# Altium PCB 4_iip_closure.PcbDoc
Units mm, origin at the board's own origin, x right, y up, seen from the top; angles counter-clockwise.
Board outline 67.5 x 28 mm, 2 copper layers (Top Layer, Bottom Layer), stack 1.571 mm thick; 4 components, 1 nets, 4 pads, 0 vias.
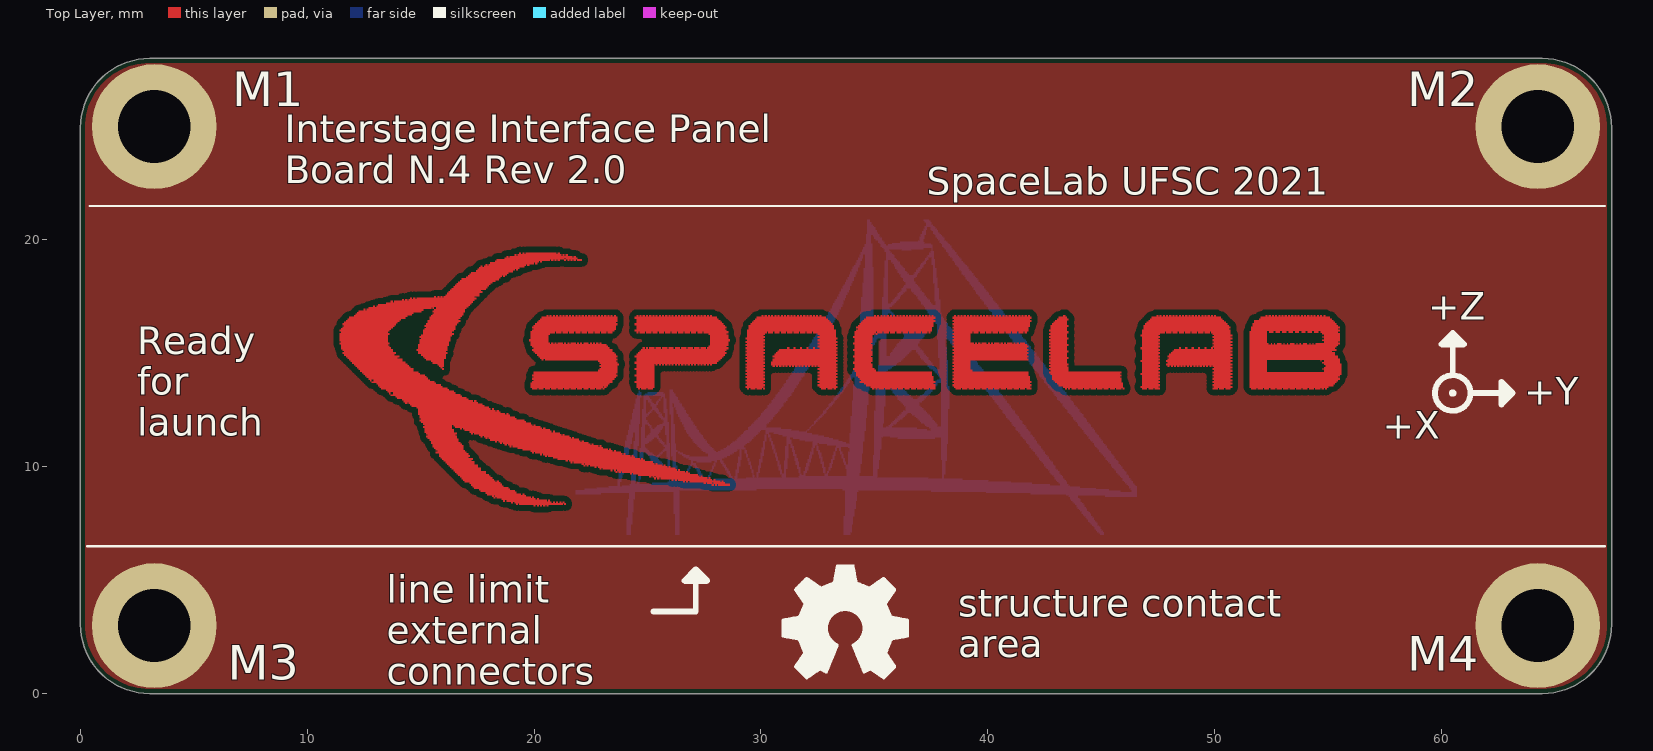
[diagram p0: Top Layer view]
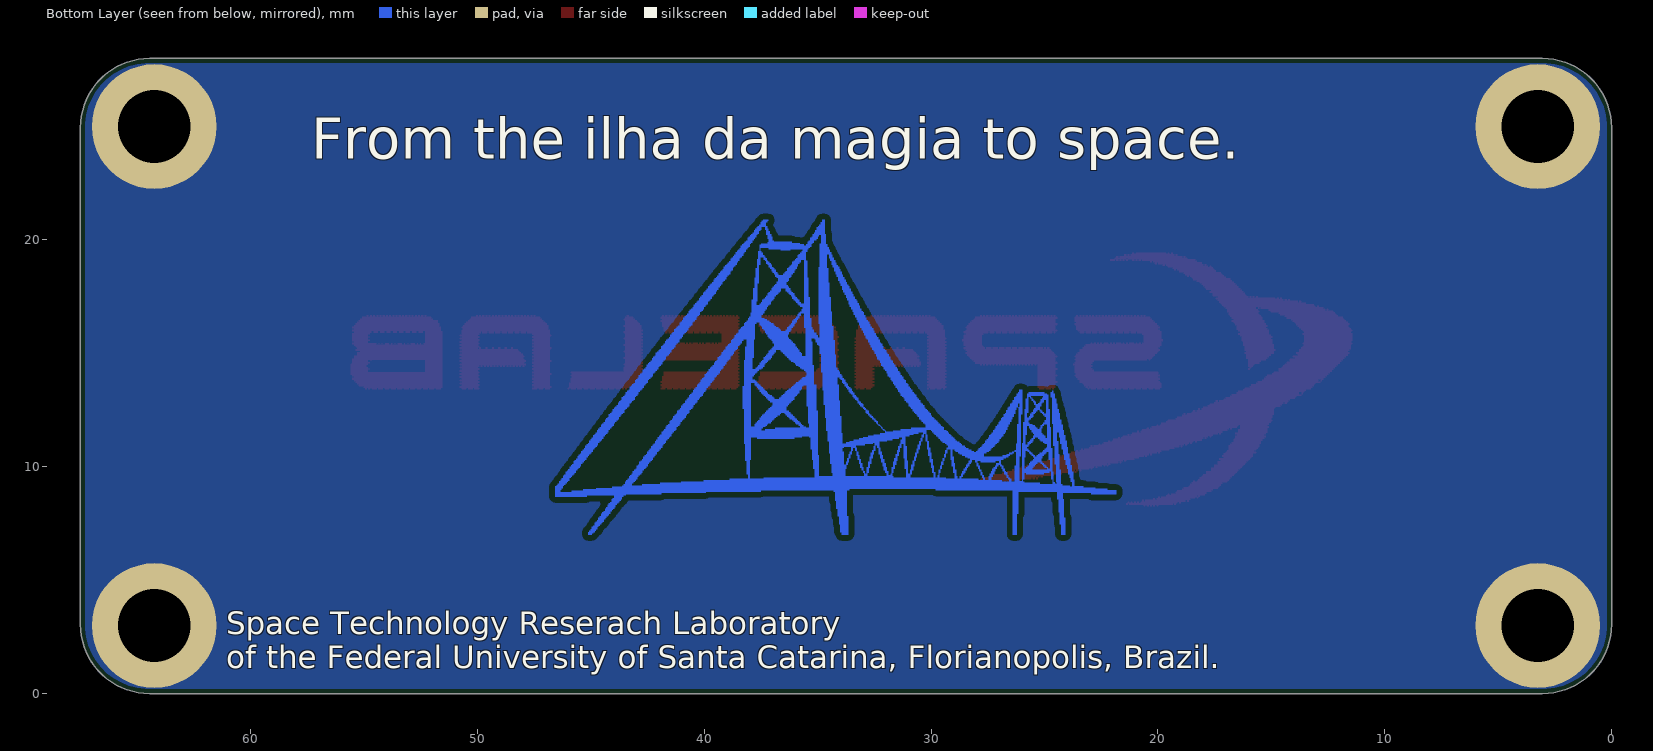
[diagram p1: Bottom Layer view, seen from below]

## Layer stack, top to bottom
Top Solder: solder mask 0.0102, Solder Resist, Dk 3.5
Top Layer: signal copper 0.0356
Dielectric 1: dielectric 1.5, FR-4, Dk 4.8
Bottom Layer: signal copper 0.0356
Bottom Solder: solder mask 0.0102, Solder Resist, Dk 3.5

## Board outline
0,3.048 ccw(c3.048,3.048) 3.048,0 64.452,0 ccw(c64.452,3.048) 67.5,3.048 67.5,24.952 ccw(c64.452,24.952) 64.452,28 3.048,28 ccw(c3.048,24.952) 0,24.952

## Design rules (kind name [scope] priority, off if disabled: settings)
BoardOutlineClearance BoardOutlineClearance_JLCPCB [All] p1: gap=0.2 ignorepadtopadclearanceinfootprint=FALSE
BoardOutlineClearance [All] p2: gap=0.254 ignorepadtopadclearanceinfootprint=FALSE except(0: Arc-SplitContinuation Track-SplitContinuation SMDPad-SplitContinuation THPad-SplitContinuation Via-SplitContinuation Fill-SplitContinuation Poly-SplitContinuation Region-SplitContinuation Text-SplitContinuation)
Clearance Clearance_JLCPCB_capabilities [All] p1: gap=0.254 ignorepadtopadclearanceinfootprint=FALSE except(0: SMDPad-Hole THPad-Hole Via-Hole Fill-Hole Poly-Hole Region-Hole Text-Hole; 0.127: Arc-Arc Arc-Track Track-Track SMDPad-SMDPad; 0.15: SMDPad-Text THPad-Text; 0.152: SMDPad-THPad; 0.2: Arc-SMDPad Track-SMDPad; 0.33: Arc-THPad Track-THPad; 0.54: THPad-THPad) // Minimal clearances considering JLCPCB manufacturing
Clearance [All] p2: gap=0.254 ignorepadtopadclearanceinfootprint=FALSE except(0: Arc-Hole Track-Hole SMDPad-Hole THPad-Hole Via-Hole Fill-Hole Poly-Hole Region-Hole Text-Hole) // Default altium designer clearence rule
HoleSize HoleSize_JLCPCB_capabilities [All] p1: absolutevalues=TRUE maxlimit=6.3 minlimit=0.3 maxpercent=80.000 minpercent=20.000
HoleSize [All] p2: absolutevalues=TRUE maxlimit=2.54 minlimit=0.025 maxpercent=80.000 minpercent=20.000
HoleToHoleClearance HoleToHoleClearance_JLCPCB [All] p1: gap=0.54 allowstackedmicrovias=TRUE
HoleToHoleClearance [All] p2: gap=0.254 allowstackedmicrovias=TRUE
MinimumAnnularRing AnnularRing_JLCPCB_1oz_capabilities [All] p1: minimumring=0.13
MinimumAnnularRing [All] p2: minimumring=0.254
MinimumSolderMaskSliver MinimumSolderMaskSliver_JLCPCB [All] p1: minsoldermaskwidth=0.2
MinimumSolderMaskSliver [All] p2: minsoldermaskwidth=0.254
PolygonConnect PolygonConnect_GND [InNet('GND')] p1: connectstyle=Direct reliefconductorwidth=0.254 reliefentries=4 polygonreliefangle="90 Angle" airgapwidth=0.254
PolygonConnect PolygonConnect_Power [(InNet('JTAG3_VCC') OR InNet('JTAG4_VCC'))] p2: connectstyle=Direct reliefconductorwidth=0.254 reliefentries=4 polygonreliefangle="90 Angle" airgapwidth=0.254 // Power polygons for power nets (debugger and battery charger)
PolygonConnect [All] p3: connectstyle=Relief reliefconductorwidth=0.254 reliefentries=4 polygonreliefangle="90 Angle" airgapwidth=0.254
RoutingVias RoutingVias_JLCPCB_capabilities [All] p1: holewidth=0.3 width=0.6 viastyle="Through Hole" minholewidth=0.3 minwidth=0.6 maxholewidth=0.711 maxwidth=1.27
RoutingVias [All] p2: holewidth=0.711 width=1.27 viastyle="Through Hole" minholewidth=0.711 minwidth=1.27 maxholewidth=0.711 maxwidth=1.27
SilkToSolderMaskClearance SilkToSolderMaskClearance_JLCPCB [IsPad] p1: minsilkscreentomaskgap=0.15 clearancetoexposedcopper=TRUE
SilkToSolderMaskClearance [IsPad] p2: minsilkscreentomaskgap=0.254 clearancetoexposedcopper=TRUE
SolderMaskExpansion SolderMaskExpansion_JLCPCB [All] p1: expansion=0.05
SolderMaskExpansion [All] p2: expansion=0.102
Width Width_JLCPCB_capabilities [All] p1: maxlimit=0.508 minlimit=0.127 preferedwidth=0.254 minimp=50.000000 maximp=50.000000 favimp=50.000000 // Width considering JLCPCB manufacturing
Width [All] p2: maxlimit=0.254 minlimit=0.254 preferedwidth=0.254
26 further rules are at their usual default settings.

## Components (designator, comment, footprint, x,y, rotation, side; value= is the part's Value field where it differs from the comment)
M1 "IB Mechanical Hole" "M3 hole (5.5mm pad)"#1 3.25,25 r0 top
M2 "IB Mechanical Hole" "M3 hole (5.5mm pad)"#1 64.25,25 r0 top
M3 "IB Mechanical Hole" "M3 hole (5.5mm pad)"#2 3.25,2 r0 top
M4 "IB Mechanical Hole" "M3 hole (5.5mm pad)"#2 64.25,2 r0 top

## Footprints (in the part's own frame and the unit in brackets; to place one, negate y for a bottom-side part, rotate by r counter-clockwise, add the part's x,y. Pads: shape width x height; smd on the part's side, far side on the other; paste and mask are expansions set on the pad)
"M3 hole (5.5mm pad)"#1 [mm]
  round 5.5 hole 3.2: 0(0,0)
"M3 hole (5.5mm pad)"#2 [mm]
  round 5.5 hole 3.2: 0(0,1)

## Part data
M1 M2 M3 M4: "Mechanical Hole for FloripaSat-2 interface boards"

## Nets (pads, with @x,y where several pads share a name; then routed paths per layer and width w, separated by ;. In a path a pad name is that pad's centre, name@x,y a point inside that pad or via, vN(x,y) a via of type N, cw(c..) or ccw(c..) an arc to the next point about the centre after c; other vN are vias at no path point)
GND: M1.0 M2.0 M3.0 M4.0

## Polygon pours and split planes (outlines as drawn)
GND on Top Layer "Top Layer-GND" (solid, remove dead copper, pour order 12): 0,24.952 cw(c3.048,24.952) 3.048,28 64.452,28 cw(c64.452,24.952) 67.5,24.952 67.5,3.048 cw(c64.452,3.048) 64.452,0 3.048,0 cw(c3.048,3.048) 0,3.048
GND on Bottom Layer "Top Layer-GND" (solid, remove dead copper, pour order 20): 0,24.952 cw(c3.048,24.952) 3.048,28 64.452,28 cw(c64.452,24.952) 67.5,24.952 67.5,3.048 cw(c64.452,3.048) 64.452,0 3.048,0 cw(c3.048,3.048) 0,3.048

## Other copper
Top Layer:
  region: 21.332,8.394 21.402,8.394 21.402,8.324 21.332,8.324 21.332,8.394 21.261,8.394 21.261,8.465 21.332,8.465
  region: 201 vertices and 0 holes, not listed, extent 42.702,13.419 46.028,16.674
  region: 301 vertices and 0 holes, not listed, extent 34.069,13.419 37.678,16.674
  region: 407 vertices and 0 holes, not listed, extent 24.445,13.419 28.62,16.674
  region: 495 vertices and 0 holes, not listed, extent 46.736,13.419 50.769,16.674
  region: 511 vertices and 0 holes, not listed, extent 29.328,13.419 33.361,16.674
  region: 387 vertices and 0 holes, not listed, extent 38.456,13.419 41.924,16.674
  region: 386 vertices and 0 holes, not listed, extent 19.775,13.419 23.738,16.674
  region: 253 vertices and 3 holes, not listed, extent 51.547,13.419 55.581,16.674
  region: 1334 vertices and 3 holes, not listed, extent 11.425,8.253 28.62,19.433
  text "'.Layer_Name'" at 177.571,-11.538 h2.5
Bottom Layer:
  region: 1551 vertices and 46 holes, not listed, extent 21.838,7.005 46.565,20.896
  text "'.Layer_Name'" at 177.571,-11.538 h2.5

## Silkscreen, mask and mechanical layers (free items; w line width, h text height)
Top Overlay:
  drawing of 988 lines, arcs and shapes, not listed
  text "Interstage Interface Panel  / Board N.4 Rev 2.0" at 9,22.5 h1.2
  text "SpaceLab UFSC 2021" at 37.3,22 h1.2
  text "+Z" at 59.41,16.475 h1.2
  text "+Y" at 63.66,12.725 h1.2
  text "Ready / for / launch" at 2.5,11.367 h1.2
  text "+X" at 57.41,11.225 h1.2
  text "structure contact / area" at 38.7,1.596 h1.2
  text "line limit  / external / connectors" at 13.5,0.4 h1.2
  text "'.Layer_Name'" at 177.571,-11.538 h2.5
Bottom Overlay:
  text "From the ilha da magia to space." at 57.325,23.575 h1.8
  text "Space Technology Reserach Laboratory / of the Federal University of Santa Catarina, Florianopolis, Brazil." at 61.075,1.125 h1
  text "'.Layer_Name'" at 177.571,-11.538 h2.5
Top Paste:
  text "'.Layer_Name'" at 177.571,-11.538 h2.5
Bottom Paste:
  text "'.Layer_Name'" at 177.571,-11.538 h2.5
Top Solder:
  drawing of 10 lines, arcs and shapes, not listed
  text "'.Layer_Name'" at 177.571,-11.538 h2.5
Bottom Solder:
  region: 1551 vertices and 46 holes, not listed, extent 21.838,7.005 46.565,20.896
  text "'.Layer_Name'" at 177.571,-11.538 h2.5
Drill Guide:
  text "'.Layer_Name'" at 177.571,-11.538 h2.5
Board Edge:
  lines w0.2: 0,3.065 ccw(c3.065,3.065) 3.065,0 64.435,0 ccw(c64.435,3.065) 67.5,3.065 67.5,24.959 ccw(c64.459,24.959) 64.459,28 3.139,28 ccw(c3.139,24.861) 0,24.861 0,13.8 0,3.065
  text "'.Layer_Name'" at 193.75,-11.425 h2.5
Dimensions:
  circle w0.2: c64.25,25 r1.6
  circle w0.2: c64.25,2.975 r1.6
  circle w0.2: c3.25,3 r1.6
  circle w0.2: c3.25,25 r1.6
  region: 34.45,5.337 34.95,5.837 35.45,5.337
  lines w0.2: 0.3,6.5 67.15,6.5 ; 0.3,21.5 67.15,21.5
  lines w0.254: 33.085,4.097 34.95,4.097 34.95,5.962 ; 33.75,0.025 33.75,28 ; 34.45,5.462 34.95,5.962 ; 35.45,5.462 34.95,5.962
  text "Mechanical specs:" at 13.25,30.525 h1.5
  text "structure contact area" at 20.275,23.5 h1.2
  text "external connectors area" at 18.775,13.275 h1.2
  text "structure contact area" at 35.875,4.35 h1.2
  text "(cm)" at 18.325,3.975 h1
  text "line limit  / external connectors" at 16.15,1.525 h1.2
  text "'.Layer_Name'" at 177.571,-11.538 h2.5
BOTTOM ASM:
  text "'.Layer_Name'" at 177.601,-11.533 h2.5
TOP ASM:
  text "'.Layer_Name'" at 177.571,-11.538 h2.5
Sheet:
  drawing of 228 lines, arcs and shapes, not listed
  text "1" at 8.746,161.611 h1.78
  text "2" at 81.39,161.611 h1.78
  text "3" at 154.542,161.611 h1.78
  text "4" at 227.44,161.611 h1.78
  text "A" at -25.595,138.599 h1.78
  text "A" at 261.425,138.599 h1.78
  text "B" at -25.595,90.542 h1.78
  text "B" at 261.425,90.542 h1.78
  text "Layer" at 2.899,70.325 h1.2
  text "Name" at 11.097,70.325 h1.2
  text "Material" at 29.692,70.325 h1.2
  text "Thickness" at 46.887,70.325 h1.2
  text "Constant" at 59.884,70.325 h1.2
  text "Board Layer Stack" at 71.281,70.325 h1.2
  text "1" at 2.899,67.925 h1.2
  text "Top Overlay" at 11.097,67.925 h1.2
  text "2" at 2.899,65.525 h1.2
  text "Top Solder" at 11.097,65.525 h1.2
  text "Solder Resist" at 29.692,65.525 h1.2
  text "0.010mm" at 46.887,65.525 h1.2
  text "3.5" at 59.884,65.525 h1.2
  text "3" at 2.899,63.125 h1.2
  text "Top Layer" at 11.097,63.125 h1.2
  text "Copper" at 29.692,63.125 h1.2
  text "0.036mm" at 46.887,63.125 h1.2
  text "4" at 2.899,60.725 h1.2
  text "Dielectric 1" at 11.097,60.725 h1.2
  text "FR-4" at 29.692,60.725 h1.2
  text "1.500mm" at 46.887,60.725 h1.2
  text "4.8" at 59.884,60.725 h1.2
  text "5" at 2.899,58.325 h1.2
  text "Bottom Layer" at 11.097,58.325 h1.2
  text "Copper" at 29.692,58.325 h1.2
  text "0.036mm" at 46.887,58.325 h1.2
  text "6" at 2.899,55.925 h1.2
  text "Bottom Solder" at 11.097,55.925 h1.2
  text "Solder Resist" at 29.692,55.925 h1.2
  text "0.010mm" at 46.887,55.925 h1.2
  text "3.5" at 59.884,55.925 h1.2
  text "Fabrication specifications:" at 139.357,54.778 h3.1
  text "7" at 2.899,53.525 h1.2
  text "Bottom Overlay" at 11.097,53.525 h1.2
  text "C" at -25.595,42.028 h1.78
  text "C" at 261.425,42.028 h1.78
  text "- Copper base: 1oz  / - PCB Material: Prepeg FR4-Standard / - PCB Tickness: 1.6mm / - PCB Surface: HASL (with lead)" at 139.351,37.794 h1.73
  text "- Silkscreen Color: White (top and bottom) / - Soldermask Color: Green / - Vias: Force Complete Tenting / - Stack-up: Standard 2 layer 1.6mm thickness / - Special requirements: None" at 197.051,37.794 h1.73
  text "SpaceLab - Federal University of Santa Catarina" at 170.5,-2 h2.5
  text "D" at -25.595,-5.978 h1.78
  text "D" at 261.425,-5.978 h1.78
  text "Project:" at 170.5,-6.5 h2.5
  text "Interstage Interface Panel Nº4" at 178.5,-6.5 h2.5
  text "Layer:" at 170.5,-11.5 h2.5
  text "Designed by:" at 170.5,-16.5 h2.5
  text "Project Code:" at 228.5,-16.5 h2.5
  text "IIP4" at 243,-16.5 h2.5
  text "Yan C. de Azeredo" at 184.426,-16.533 h2.5
  text "v2.0" at 208.526,-21.433 h2.5
  text "Date:" at 170.5,-21.5 h2.5
  text "'.Print_Date'" at 176.5,-21.5 h2.5
  text "Version:" at 199.5,-21.5 h2.5
  text "Size:" at 228.5,-21.5 h2.5
  text "A4" at 234.5,-21.5 h2.5
  text "1" at 8.746,-26.349 h1.78
  text "2" at 81.39,-26.349 h1.78
  text "3" at 154.542,-26.349 h1.78
  text "4" at 227.44,-26.349 h1.78
Drill Drawing:
  lines w0.2: -14.981,43.65 -13.647,43.65 -13.647,44.983 -14.981,44.983 -14.981,43.65
  lines w0.3: -16.176,42.75 122.826,42.75 ; -16.176,45.75 122.826,45.75 ; -5.159,39.75 -5.159,48.75 ; 4.439,39.75 4.439,48.75 ; 27.432,39.75 27.432,48.75 ; 37.549,39.75 37.549,48.75 ; 52.226,39.75 52.226,48.75 ; 82.217,39.75 82.217,48.75 ; 94.013,39.75 94.013,48.75 ; 108.929,39.75 108.929,48.75 ; -16.176,39.75 122.826,39.75 122.826,48.75 -16.176,48.75 -16.176,39.75
  text "Symbol" at -14.376,46.65 h1.44
  text "Count" at -4.259,46.65 h1.44
  text "Hole Size" at 5.339,46.65 h1.44
  text "Plated" at 28.332,46.65 h1.44
  text "Hole Type" at 38.449,46.65 h1.44
  text "Drill Layer Pair" at 53.126,46.65 h1.44
  text "Via/Pad" at 83.117,46.65 h1.44
  text "Pad Shape" at 94.913,46.65 h1.44
  text "Template" at 109.829,46.65 h1.44
  text "4" at -4.259,43.65 h1.2
  text "3.200mm (125.98mil)" at 5.339,43.65 h1.2
  text "PTH" at 28.332,43.65 h1.2
  text "Round" at 38.449,43.65 h1.2
  text "Top Layer - Bottom Layer" at 53.126,43.65 h1.2
  text "Pad" at 83.117,43.65 h1.2
  text "Rounded" at 94.913,43.65 h1.2
  text "c550h320" at 109.829,43.65 h1.2
  text "4 Total" at -4.259,40.65 h1.2
  text "'.Layer_Name'" at 177.571,-11.538 h2.5
  text "'.Layer_Name'" at 177.571,-11.538 h2.5

## Dimensions
3.25,3 to 17.575,4.675 on Dimensions
64.25,3 to 64.25,25 on Dimensions
2.95,28 to 2.95,21.5 on Dimensions
-0.275,6.5 to -0.275,21.5 on Dimensions
3.25,3 to 64.25,3 on Dimensions
0,28 to 67.5,28 on Dimensions
0,0 to 0,28 on Dimensions